# Altium PCB breakout_32QFN-32TQFP.PcbDoc
Units mm, origin at the board's own origin, x right, y up, seen from the top; angles counter-clockwise.
Board outline 43.18 x 20.32 mm, 2 copper layers (Top Layer, Bottom Layer); 4 components, 33 nets, 98 pads, 4 vias.
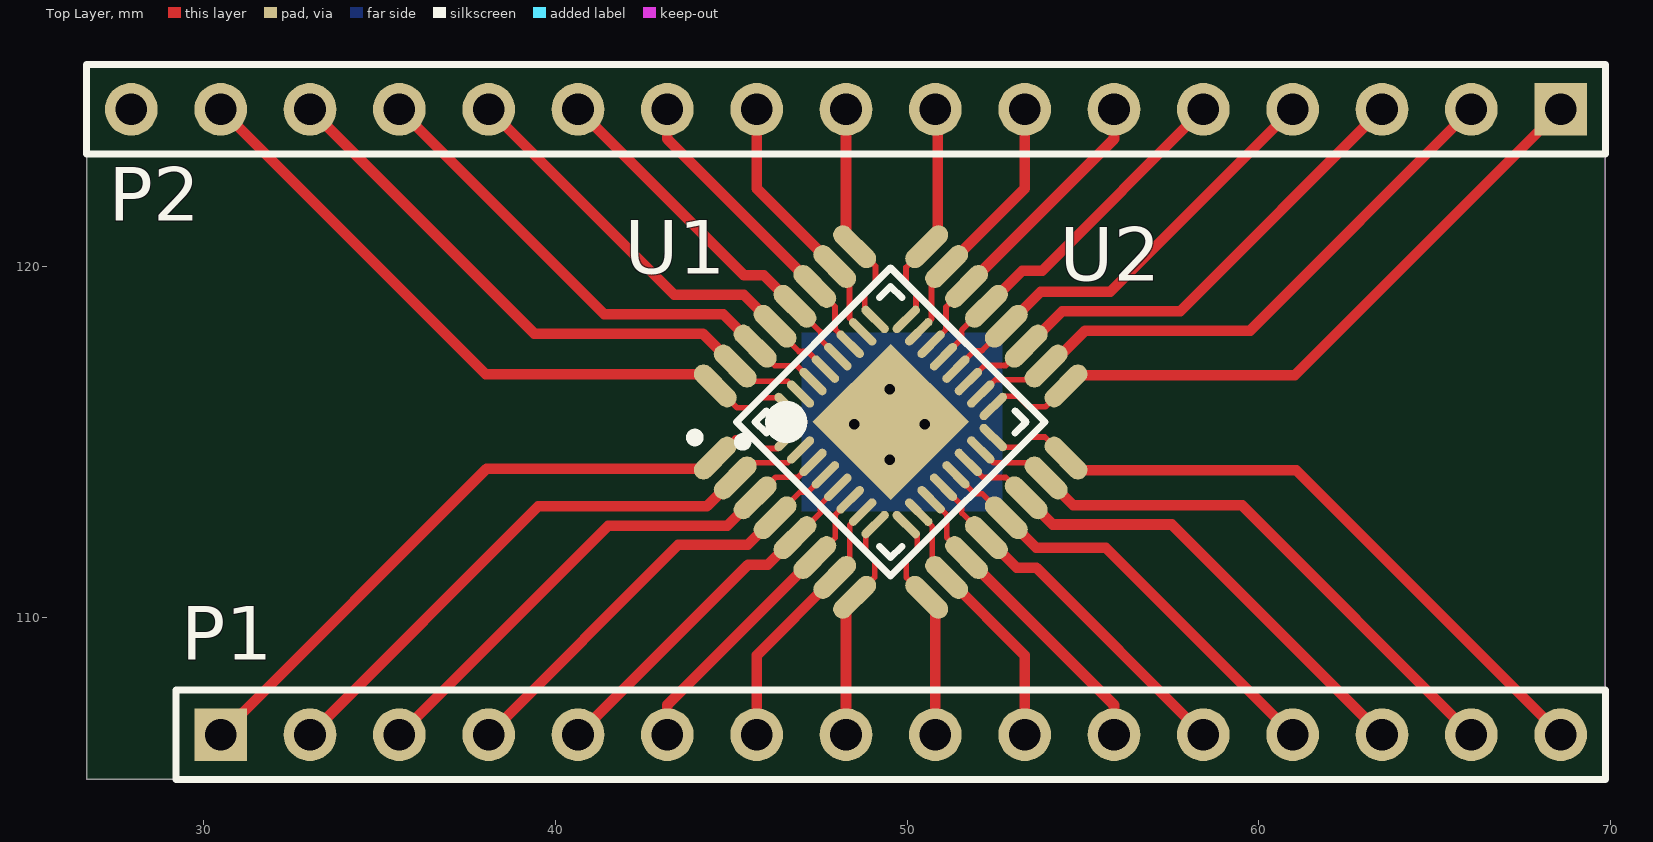
[diagram p0: Top Layer view]
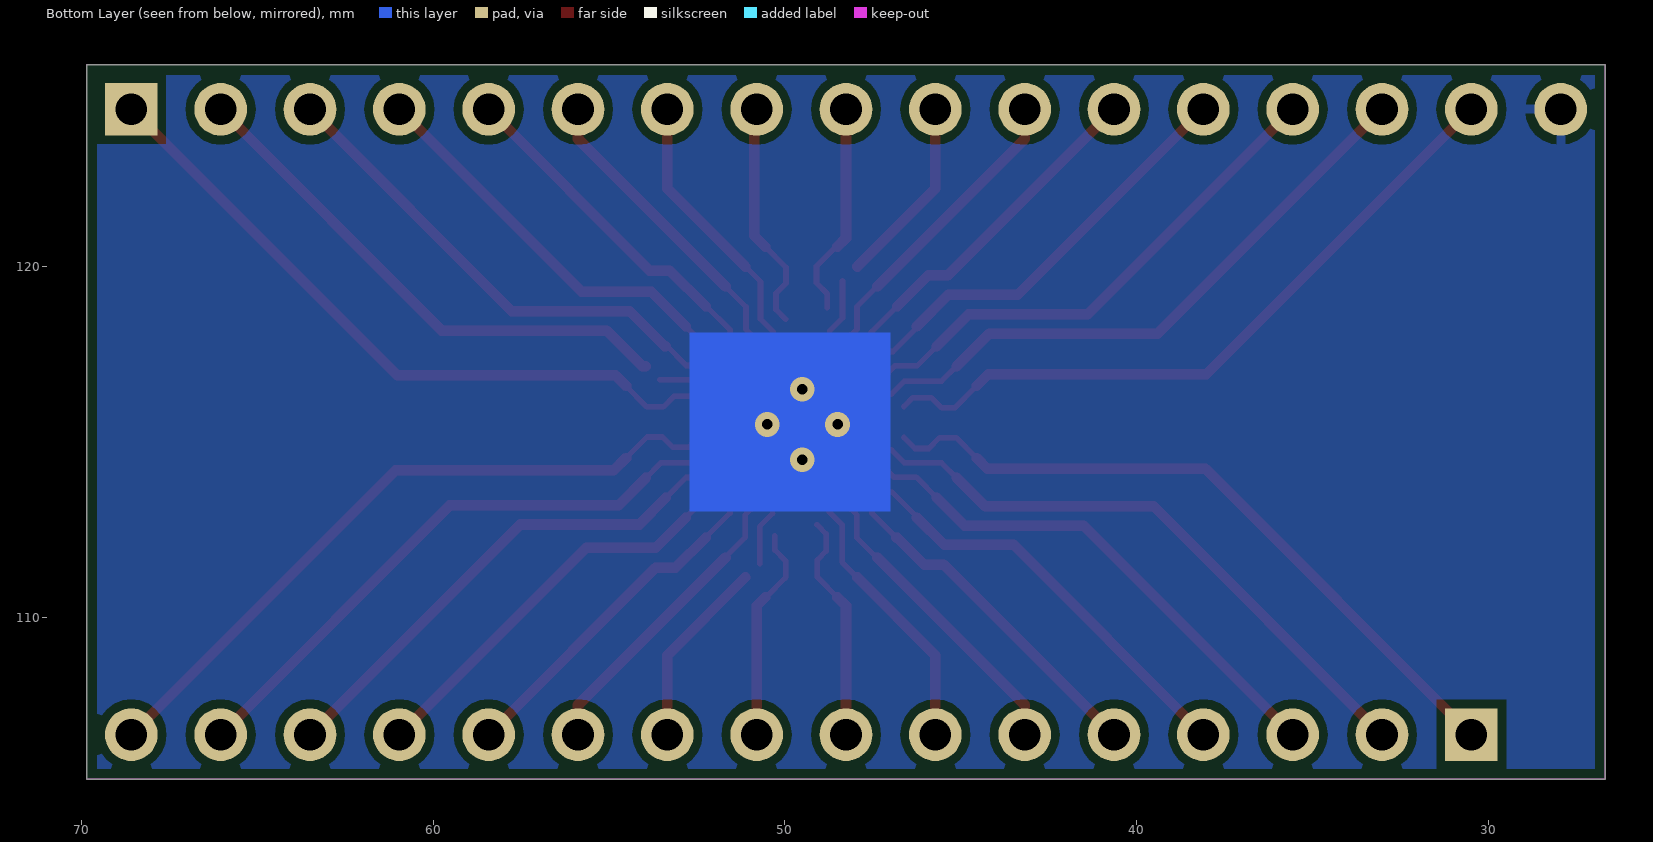
[diagram p1: Bottom Layer view, seen from below]

## Layer stack, top to bottom
Top Solder: solder mask 0.0102, Solder Resist, Dk 3.5
Top Layer: signal copper 0.0356
Dielectric 1: dielectric 0.32, FR-4, Dk 4.8
Bottom Layer: signal copper 0.0356
Bottom Solder: solder mask 0.0102, Solder Resist, Dk 3.5

## Board outline
26.67,105.41 69.85,105.41 69.85,125.73 26.67,125.73

## Design rules (kind name [scope] priority, off if disabled: settings)
BoardOutlineClearance [All] p1: gap=0.3
Clearance [All] p1: gap=0.25 except(0.102: SMDPad-SMDPad)
ComponentClearance [All] p1: gap=0.1 collisioncheckmode=3 verticalgap=0.254 showdistances=FALSE
FabricationTestPointUsage TestPointUsage [All] p1: valid=0 allowmultiple=FALSE
FabricationTestpoint Testpoint [All] p1: side=3 testpointundercomponent=TRUE minsize=1.016 maxsize=2.54 preferedsize=1.524 minholesize=0 maxholesize=1.016 preferedholesize=0.813 testpointgrid=0.025 allowsidetop=TRUE allowsidebottom=TRUE usegrid=TRUE gridtolerance=0
HoleSize [All] p1: absolutevalues=TRUE maxlimit=6.3 minlimit=0.3 maxpercent=80.000 minpercent=20.000
HoleToHoleClearance [All] p1: gap=0.45 allowstackedmicrovias=TRUE
MinimumAnnularRing [All] p1: minimumring=0.152
MinimumSolderMaskSliver [All] p1: minsoldermaskwidth=0.051
PlaneConnect [All] p1: planeconnectstyle=Direct reliefexpansion=0.508 reliefentries=4 reliefconductorwidth=0.254 reliefairgap=0.254
PolygonConnect "GND Via" [isVia AND InNet('GND')] p1: connectstyle=Direct reliefconductorwidth=0.254 reliefentries=4 polygonreliefangle="90 Angle" airgapwidth=0.254 // GND Via Connection
PolygonConnect [All] p2: connectstyle=Relief reliefconductorwidth=0.254 reliefentries=4 polygonreliefangle="90 Angle" airgapwidth=0.254
RoutingVias [All] p1: holewidth=0.6 width=1 viastyle="Through Hole" minholewidth=0.3 minwidth=0.7 maxholewidth=6.3 maxwidth=6.808
SilkToSilkClearance [All] p1: silktosilkclearance=0.15
SilkToSolderMaskClearance SilkscreenOverComponentPads [IsPad] p1: minsilkscreentomaskgap=0.25 clearancetoexposedcopper=TRUE
SolderMaskExpansion [All] p1: expansion=0.076
Width [All] p1: maxlimit=1.25 minlimit=0.16 preferedwidth=0.25 minimp=50.000000 maximp=50.000000 favimp=50.000000
21 further rules are at their usual default settings.

## Components (designator, comment, footprint, x,y, rotation, side; value= is the part's Value field where it differs from the comment)
P1 "Header 16" HDR1X16 30.48,106.68 r0 top
P2 "Header 17" HDR1X17 68.58,124.46 r180 top
U1 "GENERIC" TQFP80P900X900X120-32N-GENERIC 49.53,115.57 r45 top
U2 "ADS7952SRHBT" ADS7952SRHBT 49.53,115.57 r45 top

## Footprints (in the part's own frame and the unit in brackets; to place one, negate y for a bottom-side part, rotate by r counter-clockwise, add the part's x,y. Pads: shape width x height; smd on the part's side, far side on the other; paste and mask are expansions set on the pad)
ADS7952SRHBT [mm] "Digikey: 296-25843-1-ND -- 12 Bit Analog to Digital Converter 12 Input 1 SAR 32-VQFN (5x5)"
  oval 1x0.25 smd: 1(-2.375,1.75) 2(-2.375,1.25) 3(-2.375,0.75) 4(-2.375,0.25) 5(-2.375,-0.25) 6(-2.375,-0.75) 7(-2.375,-1.25) 8(-2.375,-1.75) 17(2.375,-1.75) 18(2.375,-1.25) 19(2.375,-0.75) 20(2.375,-0.25) 21(2.375,0.25) 22(2.375,0.75) 23(2.375,1.25) 24(2.375,1.75)
  oval 0.25x1 smd: 9(-1.75,-2.375) 10(-1.25,-2.375) 11(-0.75,-2.375) 12(-0.25,-2.375) 13(0.25,-2.375) 14(0.75,-2.375) 15(1.25,-2.375) 16(1.75,-2.375) 25(1.75,2.375) 26(1.25,2.375) 27(0.75,2.375) 28(0.25,2.375) 29(-0.25,2.375) 30(-0.75,2.375) 31(-1.25,2.375) 32(-1.75,2.375)
  rect 3.15x3.15 smd mask+0.102: 33(0,0)
  silkscreen extent -3.5,-2.73 2.73,2.72, body extent -2.59,-2.59 2.59,2.59, height 0.8
HDR1X16 [mm] "Connector; Header; 16 Position"
  rect 1.5x1.5 hole 0.9: 1(0,0)
  round 1.5 hole 0.9: 2(2.54,0) 3(5.08,0) 4(7.62,0) 5(10.16,0) 6(12.7,0) 7(15.24,0) 8(17.78,0) 9(20.32,0) 10(22.86,0) 11(25.4,0) 12(27.94,0) 13(30.48,0) 14(33.02,0) 15(35.56,0) 16(38.1,0)
  silkscreen extent -1.27,-1.27 39.37,1.27
HDR1X17 [mm] "Connector; Header; 17 Position"
  rect 1.5x1.5 hole 0.9: 1(0,0)
  round 1.5 hole 0.9: 2(2.54,0) 3(5.08,0) 4(7.62,0) 5(10.16,0) 6(12.7,0) 7(15.24,0) 8(17.78,0) 9(20.32,0) 10(22.86,0) 11(25.4,0) 12(27.94,0) 13(30.48,0) 14(33.02,0) 15(35.56,0) 16(38.1,0) 17(40.64,0)
  silkscreen extent -1.27,-1.27 41.91,1.27
TQFP80P900X900X120-32N-GENERIC [mm] "TQFP, 32-Leads, Body 7.00x7.00mm, Pitch 0.80mm, IPC Medium Density"
  oval 1.5x0.55 smd: 1(-4.25,2.8) 2(-4.25,2) 3(-4.25,1.2) 4(-4.25,0.4) 5(-4.25,-0.4) 6(-4.25,-1.2) 7(-4.25,-2) 8(-4.25,-2.8) 17(4.25,-2.8) 18(4.25,-2) 19(4.25,-1.2) 20(4.25,-0.4) 21(4.25,0.4) 22(4.25,1.2) 23(4.25,2) 24(4.25,2.8)
  oval 0.55x1.5 smd: 9(-2.8,-4.25) 10(-2,-4.25) 11(-1.2,-4.25) 12(-0.4,-4.25) 13(0.4,-4.25) 14(1.2,-4.25) 15(2,-4.25) 16(2.8,-4.25) 25(2.8,4.25) 26(2,4.25) 27(1.2,4.25) 28(0.4,4.25) 29(-0.4,4.25) 30(-1.2,4.25) 31(-2,4.25) 32(-2.8,4.25)
  silkscreen extent -4.37,-3.1 3.1,3.75, body extent -4.5,-4.5 4.5,4.5, height 1.2

## Part data
P1: "Header, 16-Pin"
P2: "Header, 17-Pin"
U1: library part TQFP80P900X900X120-32N-GENERIC
U2: "Digikey: 296-25843-1-ND -- 12 Bit Analog to Digital Converter 12 Input 1 SAR 32-VQFN (5x5)"

## Via types
v1: diameter 0.7, hole 0.3, Top Layer to Bottom Layer, 4 vias

## Nets (pads, with @x,y where several pads share a name; then routed paths per layer and width w, separated by ;. In a path a pad name is that pad's centre, name@x,y a point inside that pad or via, vN(x,y) a via of type N, cw(c..) or ccw(c..) an arc to the next point about the centre after c; other vN are vias at no path point)
1: P1.1 U1.1 U2.1 | length 19.9
  Top Layer w0.16: U1.1 45.125,115.125 45.6,115.125 45.907,114.818 46.303,114.818 U2.1
  Top Layer w0.3: P1.1 38.04,114.24 44.24,114.24 U1.1
2: P1.2 U1.2 U2.2 | length 17.3
  Top Layer w0.16: U1.2 45.539,114.408 46.6,114.408 U2.2
  Top Layer w0.3: P1.2 39.515,113.175 44.307,113.175 U1.2
3: P1.3 U1.3 U2.3 | length 15
  Top Layer w0.16: U1.3 46.261,113.998 46.897,113.998 U2.3
  Top Layer w0.3: P1.3 41.505,112.625 44.888,112.625 U1.3
4: P1.4 U1.4 U2.4 | length 12.6
  Top Layer w0.16: U1.4 46.242,112.867 46.95,113.575 47.175,113.575 47.667,114.067 U2.4
  Top Layer w0.3: P1.4 43.495,112.075 45.469,112.075 U1.4
5: P1.5 U1.5 U2.5 | length 10.4
  Top Layer w0.16: U1.5@46.832,112.282 47.525,112.975 47.525,113.211 U2.5
  Top Layer w0.3: P1.5 45.475,111.515 46.041,111.515 U1.5 U1.5@46.832,112.282
6: P1.6 U1.6 U2.6 | length 8.8
  Top Layer w0.16: U1.6 47.391,111.716 47.958,112.283 47.958,112.937 U2.6
  Top Layer w0.3: P1.6 43.18,107.523 U1.6
7: P1.7 U1.7 U2.7 | length 7.6
  Top Layer w0.16: U1.7 48.368,111.579 48.368,112.64 U2.7
  Top Layer w0.3: P1.7 45.72,108.932 U1.7
8: P1.8 U1.8 U2.8 | length 6.5
  Top Layer w0.16: U1.8 49.075,111.155 49.075,111.65 48.825,111.9 48.825,112.39 U2.8
  Top Layer w0.3: P1.8 48.26,110.34 U1.8
9: P1.9 U1.9 U2.9 | length 6.1
  Top Layer w0.16: U2.9@50.282,112.328 50.282,111.932 49.975,111.625 49.975,111.15 U1.9@50.555,110.57
  Top Layer w0.3: U1.9 50.8,110.34 P1.9
10: P1.10 U1.10 U2.10 | length 7
  Top Layer w0.16: U2.10@50.35,112.967 50.717,112.6 U1.10@50.717,111.539
  Top Layer w0.3: U1.10 53.34,108.932 P1.10
11: P1.11 U1.11 U2.11 | length 8.8
  Top Layer w0.16: U2.11@50.704,113.345 51.127,112.922 51.127,112.286 U1.11@51.712,111.701
  Top Layer w0.3: U1.11 55.88,107.523 P1.11
12: P1.12 U1.12 U2.12 | length 10.4
  Top Layer w0.16: U2.12 51.555,113.191 51.555,112.979 U1.12
  Top Layer w0.3: U1.12 53.109,111.425 53.675,111.425 P1.12
13: P1.13 U1.13 U2.13 | length 12.6
  Top Layer w0.16: U2.13 51.919,113.535 52.131,113.535 U1.13
  Top Layer w0.3: U1.13 53.671,111.995 55.645,111.995 P1.13
14: P1.14 U1.14 U2.14 | length 14.9
  Top Layer w0.16: U2.14@51.803,114.294 51.856,114.294 52.16,113.99 52.807,113.99 U1.14
  Top Layer w0.3: U1.14 54.142,112.655 57.525,112.655 P1.14
15: P1.15 U1.15 U2.15 | length 17.3
  Top Layer w0.16: U2.15 52.46,114.408 52.9,114.408 52.903,114.41 53.518,114.41 U1.15
  Top Layer w0.3: U1.15 54.723,113.205 57.753,113.205 57.758,113.2 59.52,113.2 P1.15
16: P1.16 U1.16 U2.16 | length 19.9
  Top Layer w0.16: U2.16 52.72,114.855 53.19,114.855 53.48,115.145 53.915,115.145 U1.16
  Top Layer w0.3: U1.16 54.865,114.195 61.065,114.195 P1.16
17: P2.1 U1.17 U2.17 | length 19.4
  Top Layer w0.16: U2.17@52.747,116.307 53.143,116.307 53.45,116 53.925,116 U1.17@54.505,116.58
  Top Layer w0.3: U1.17 54.815,116.895 61.015,116.895 P2.1
18: P2.2 U1.18 U2.18 | length 16.7
  Top Layer w0.16: U2.18@52.133,116.4 52.5,116.767 U1.18@53.561,116.767
  Top Layer w0.3: U1.18 54.051,117.161 55.06,118.17 59.75,118.17 P2.2
19: P2.3 U1.19 U2.19 | length 15
  Top Layer w0.16: U2.19 52.198,117.177 52.802,117.177 53.352,117.727 U1.19
  Top Layer w0.3: U1.19 53.417,117.727 54.41,118.72 57.76,118.72 P2.3
20: P2.4 U1.20 U2.20 | length 12.6
  Top Layer w0.16: U2.20 51.914,117.6 52.126,117.6 U1.20
  Top Layer w0.3: U1.20 53.796,119.27 55.77,119.27 P2.4
21: P2.5 U1.21 U2.21 | length 10.4
  Top Layer w0.16: U2.21 51.55,117.944 51.55,118.185 52.223,118.858 U1.21
  Top Layer w0.3: U1.21 53.269,119.875 53.835,119.875 P2.5
22: P2.6 U1.22 U2.22 | length 8.8
  Top Layer w0.16: U2.22 51.102,118.203 51.102,118.839 U1.22
  Top Layer w0.3: U1.22 55.88,123.617 P2.6
23: P2.7 U1.23 U2.23 | length 7.6
  Top Layer w0.16: U2.23 50.692,118.5 50.692,119.561 U1.23
  Top Layer w0.3: U1.23 53.34,122.208 P2.7
24: P2.8 U1.24 U2.24 | length 6.6
  Top Layer w0.16: U2.24 50.25,118.765 50.25,119.23 49.965,119.515 49.965,119.965 U1.24
  Top Layer w0.3: U1.24 50.865,120.865 50.865,124.395 P2.8
25: P2.9 U1.25 U2.25 | length 6.1
  Top Layer w0.16: U1.25@48.52,120.58 49.1,120 49.1,119.525 48.793,119.218 U2.25@48.793,118.822
  Top Layer w0.3: P2.9 48.26,120.8 U1.25
26: P2.10 U1.26 U2.26 | length 7
  Top Layer w0.16: U1.26@48.358,119.586 48.358,118.525 U2.26@48.725,118.158
  Top Layer w0.3: P2.10 45.72,122.208 U1.26
27: P2.11 U1.27 U2.27 | length 8.8
  Top Layer w0.16: U1.27 47.948,118.849 47.948,118.213 U2.27
  Top Layer w0.3: P2.11 43.18,123.617 U1.27
28: P2.12 U1.28 U2.28 | length 10.4
  Top Layer w0.16: U1.28 47.538,118.128 47.538,117.916 U2.28
  Top Layer w0.3: P2.12 45.36,119.74 45.926,119.74 U1.28
29: P2.13 U1.29 U2.29 | length 12.7
  Top Layer w0.16: U1.29 46.242,118.253 46.92,117.575 47.171,117.575 U2.29
  Top Layer w0.3: P2.13 43.375,119.185 45.349,119.185 U1.29
30: P2.14 U1.30 U2.30 | length 15
  Top Layer w0.16: U1.30 46.238,117.165 46.874,117.165 U2.30 U2.30@47.257,116.719
  Top Layer w0.3: P2.14 41.385,118.635 44.768,118.635 U1.30
31: P2.15 U1.31 U2.31 | length 17.3
  Top Layer w0.16: U1.31 45.539,116.732 46.6,116.732 U2.31
  Top Layer w0.3: P2.15 39.395,118.085 44.187,118.085 U1.31
32: P2.16 U1.32 U2.32 | length 19.9
  Top Layer w0.16: U1.32 45.165,115.975 45.545,115.975 45.83,116.26 46.365,116.26 U2.32
  Top Layer w0.3: P2.16 38.015,116.925 44.215,116.925 U1.32
33: P2.17 U2.33
  other v1: 49.5,114.5 48.5,115.5 50.5,115.5 49.5,116.5

## Polygon pours and split planes (outlines as drawn)
33 on Bottom Layer "THERMAL" (solid, pour order 0): 24.13,128.27 71.12,128.27 71.12,103.505 24.13,103.505

## Keep-outs
Keep-Out Layer:
  lines w0.025: 26.67,105.41 26.67,125.73 69.85,125.73 69.85,122.555 69.85,105.41 69.393,105.41 26.67,105.41

## Other copper
Bottom Layer:
  rectangle net 33: 46.99,113.03 52.705,118.11

## Silkscreen, mask and mechanical layers (free items; w line width, h text height)
Mechanical 1:
  circle w0.254: c43.434,115.062 r0.254
  text "32" at 31.023,121.184 h1 r90
  text "31" at 33.563,121.184 h1 r90
  text "30" at 36.103,121.184 h1 r90
  text "29" at 38.643,121.184 h1 r90
  text "28" at 41.183,121.184 h1 r90
  text "27" at 43.723,121.184 h1 r90
  text "26" at 46.263,121.184 h1 r90
  text "25" at 48.803,121.184 h1 r90
  text "24" at 51.343,121.184 h1 r90
  text "23" at 53.883,121.184 h1 r90
  text "22" at 56.423,121.184 h1 r90
  text "21" at 58.963,121.184 h1 r90
  text "20" at 61.503,121.184 h1 r90
  text "19" at 64.043,121.184 h1 r90
  text "18" at 66.583,121.184 h1 r90
  text "17" at 69.123,121.184 h1 r90
  text "THERMAL" at 28.483,116.358 h1 r90
  text "1" at 30.988,108.204 h1 r90
  text "2" at 33.528,108.204 h1 r90
  text "3" at 36.068,108.204 h1 r90
  text "4" at 38.608,108.204 h1 r90
  text "5" at 41.148,108.204 h1 r90
  text "6" at 43.688,108.204 h1 r90
  text "7" at 46.228,108.204 h1 r90
  text "8" at 48.768,108.204 h1 r90
  text "9" at 51.308,108.204 h1 r90
  text "10" at 53.848,108.204 h1 r90
  text "11" at 56.388,108.204 h1 r90
  text "12" at 58.928,108.204 h1 r90
  text "13" at 61.468,108.204 h1 r90
  text "14" at 64.008,108.204 h1 r90
  text "15" at 66.548,108.204 h1 r90
  text "16" at 69.088,108.204 h1 r90